# EAGLE board clean_with_no_autoroute (EAGLE 7.2.0)
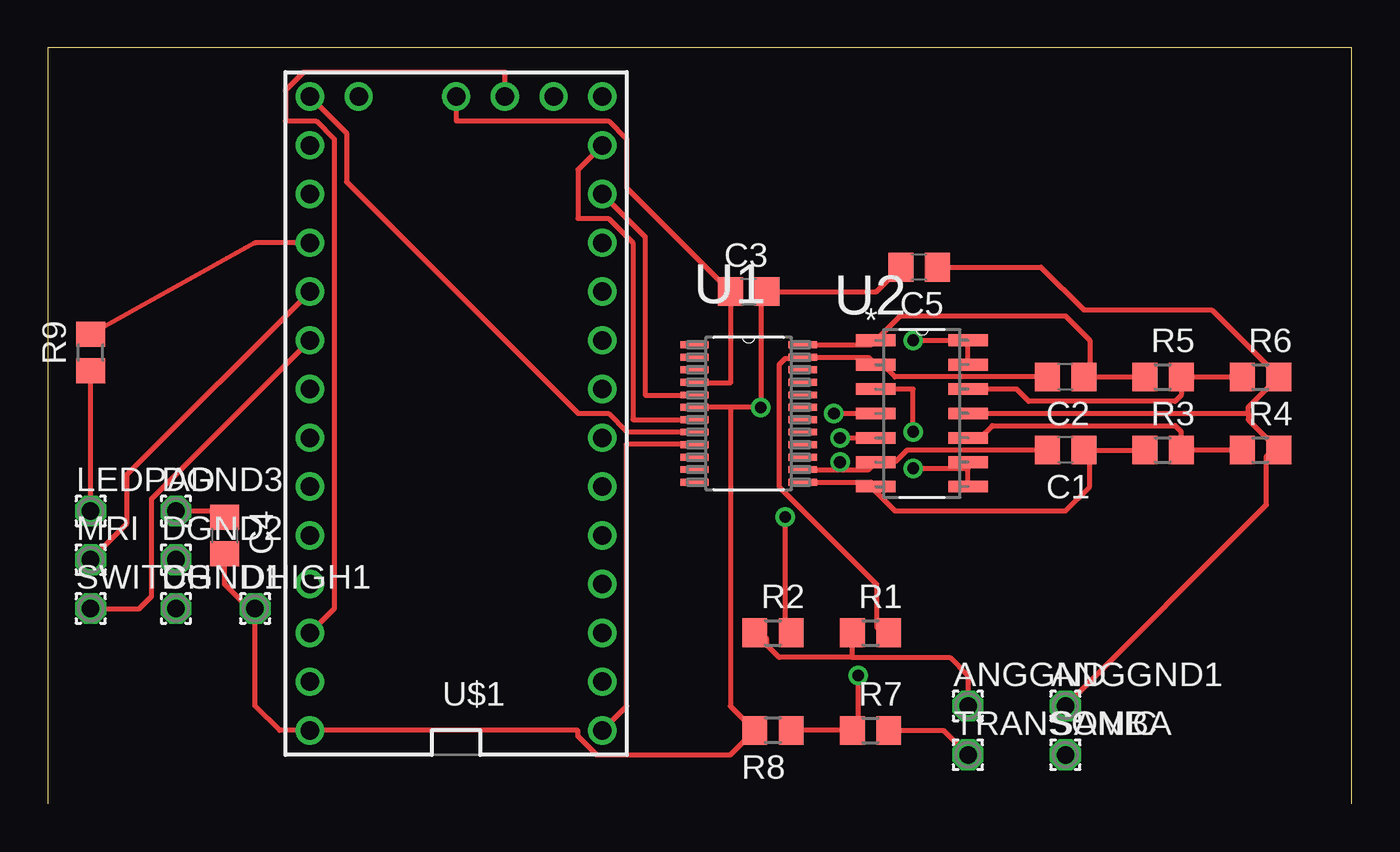
[diagram p0: board, top side]
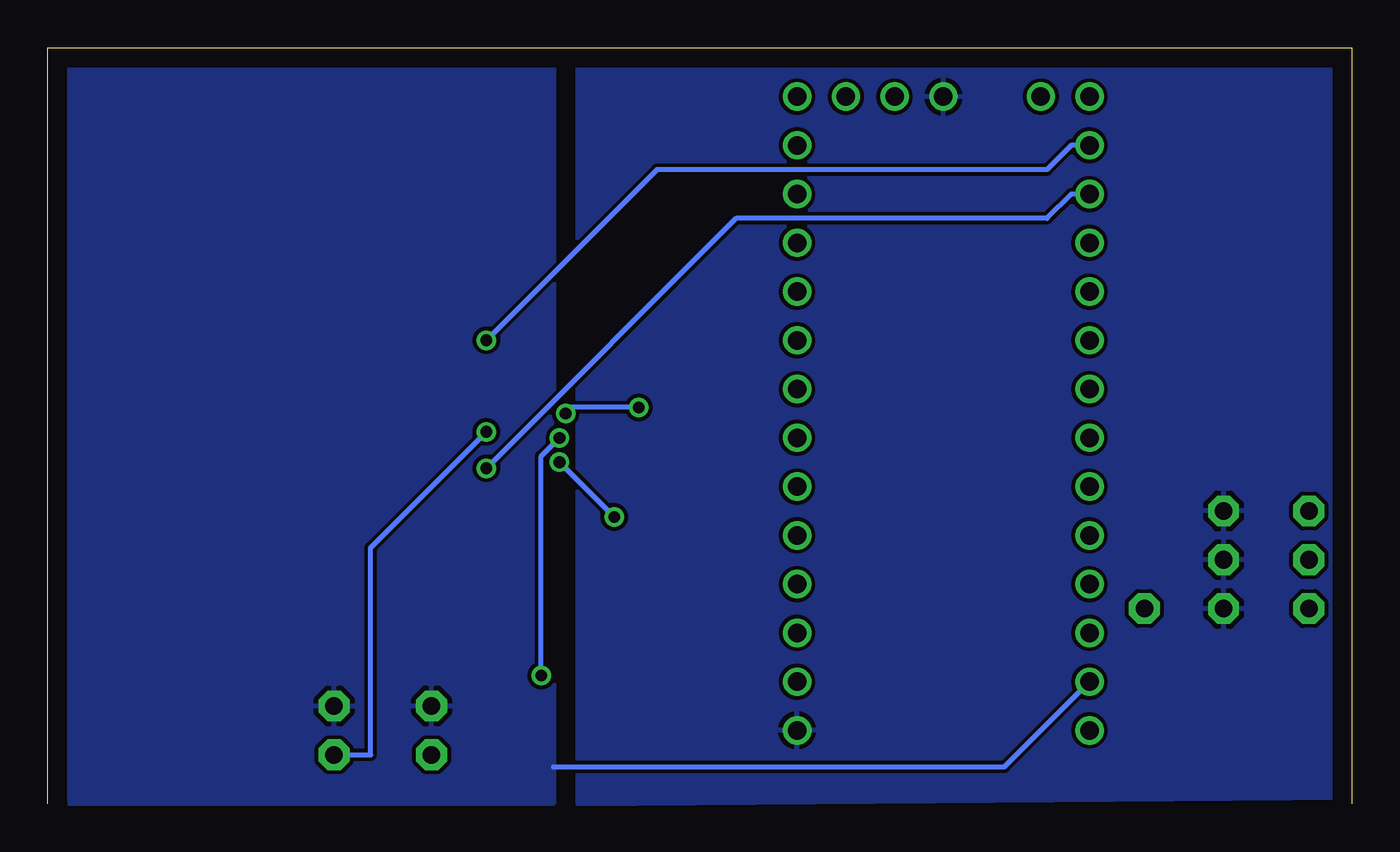
[diagram p1: board, bottom side, seen from below]

Size 67.93 x 39.36 mm. Coordinates in mm from the lower left corner, seen from the top.
Outline: 67.93,0 67.93,39.36 0,39.36 0,0
Copper layers (1*16): Top 0.035mm / dielectric 1.5mm / Bottom 0.035mm
Design rules "default": minimum track width 10mil, minimum drill 24mil, track to track 8mil, track to pad 8mil, pad to pad 8mil, via to via 8mil, smd to smd 8mil, copper to edge 40mil, drill to drill 8mil, minimum pad ring 10mil, minimum via ring 8mil, stop-mask expansion 4mil, vias tented up to drill 0mil, thermal gap 10mil

## Footprints (pad centres in the part's own frame; a part is rotated, then mirrored left to right if it is on the bottom)
1,6/0,9 = drill 0.914 pad 1.6 octagon: 1 0,0
C0805 = smd 1.3 x 1.5: 1 -0.95,0; 2 0.95,0
R0805 = smd 1.3 x 1.5: 1 -0.95,0; 2 0.95,0
SOP65P640X120-24N = smd 1.473 x 0.356: 1 -2.819,3.581; 2 -2.819,2.921; 3 -2.819,2.286; 4 -2.819,1.626; 5 -2.819,0.965; 6 -2.819,0.33; 7 -2.819,-0.33; 8 -2.819,-0.965; 9 -2.819,-1.626; 10 -2.819,-2.286; 11 -2.819,-2.921; 12 -2.819,-3.581; 13 2.819,-3.581; 14 2.819,-2.921; 15 2.819,-2.286; 16 2.819,-1.626; 17 2.819,-0.965; 18 2.819,-0.33; 19 2.819,0.33; 20 2.819,0.965; 21 2.819,1.626; 22 2.819,2.286; 23 2.819,2.921; 24 2.819,3.581
SOIC127P600X175-14N = smd 2.057 x 0.61: 1 -4.801,7.62; 2 -4.801,6.35; 3 -4.801,5.08; 4 -4.801,3.81; 5 -4.801,2.54; 6 -4.801,1.27; 7 -4.801,0; 8 0,0; 9 0,1.27; 10 0,2.54; 11 0,3.81; 12 0,5.08; 13 0,6.35; 14 0,7.62
TEENSY_3.0_BASIC-PGM = drill 0.965: 0 -7.62,13.97; 1 -7.62,11.43; 2 -7.62,8.89; 3 -7.62,6.35; 3.3V 7.62,11.43; 3.3V1 -2.54,-16.51; 4 -7.62,3.81; 5 -7.62,1.27; 6 -7.62,-1.27; 7 -7.62,-3.81; 8 -7.62,-6.35; 9 -7.62,-8.89; 10 -7.62,-11.43; 11 -7.62,-13.97; 12 -7.62,-16.51; 13 7.62,-16.51; 14/A0 7.62,-13.97; 15/A1 7.62,-11.43; 16/A2 7.62,-8.89; 17/A3 7.62,-6.35; 18/A4 7.62,-3.81; 19/A5 7.62,-1.27; 20/A6 7.62,1.27; 21/A7 7.62,3.81; 22/A8 7.62,6.35; 23/A9 7.62,8.89; AGND 7.62,13.97; GND -7.62,16.51; GND1 0,-16.51; RESET 5.08,-16.51; VBAT -5.08,-16.51; VIN 7.62,16.51

## Placement (x,y rotation side)
ANGGND  WIREPAD1,6/0,9  [1,6/0,9]  47.94,5.08 0 top
ANGGND1  WIREPAD1,6/0,9  [1,6/0,9]  53.02,5.08 0 top
C1  10pF  [C0805]  53.02,18.41 180 top
C2  10pF  [C0805]  53.02,22.23 180 top
C3  0.1uF  [C0805]  36.51,26.67 0 top
C4  0.1uF  [C0805]  9.21,13.97 270 top
C5  0.1uF  [C0805]  45.4,27.94 180 top
DGND1  WIREPAD1,6/0,9  [1,6/0,9]  6.67,10.16 0 top
DGND2  WIREPAD1,6/0,9  [1,6/0,9]  6.67,12.7 0 top
DGND3  WIREPAD1,6/0,9  [1,6/0,9]  6.67,15.24 0 top
DHIGH1  WIREPAD1,6/0,9  [1,6/0,9]  10.79,10.16 0 top
LEDPAD  WIREPAD1,6/0,9  [1,6/0,9]  2.22,15.24 0 top
MRI  WIREPAD1,6/0,9  [1,6/0,9]  2.22,12.7 0 top
R1  5k  [R0805]  42.86,8.89 0 top
R2  5k  [R0805]  37.78,8.89 0 top
R3  12k  [R0805]  58.1,18.41 0 top
R4  23.2k  [R0805]  63.18,18.41 0 top
R5  12k  [R0805]  58.1,22.23 0 top
R6  23.2k  [R0805]  63.18,22.23 0 top
R7  10k  [R0805]  42.86,3.81 0 top
R8  10k  [R0805]  37.78,3.81 180 top
R9  681  [R0805]  2.22,23.5 90 top
SAMBA  SAMBA  [1,6/0,9]  53.02,2.54 0 top
SWITCH  WIREPAD1,6/0,9  [1,6/0,9]  2.22,10.16 0 top
TRANSONIC  WIREPAD1,6/0,9  [1,6/0,9]  47.94,2.54 0 top
U1  AD5206BRUZ10  [SOP65P640X120-24N]  36.51,20.32 0 top
U2  OPA4340UA  [SOIC127P600X175-14N]  47.94,16.51 0 top
U$1  TEENSY_3.0_BASIC-PGM  [TEENSY_3.0_BASIC-PGM]  21.27,20.32 180 top

## Library data of the parts
ANGGND ANGGND1 DGND1-DGND3 DHIGH1 LEDPAD MRI SAMBA SWITCH TRANSONIC = wirepad
C1-C5 R1-R9 = resistor
U1 = AD5206; MPN: AD5206BRUZ10; OC_FARNELL: unknown; OC_NEWARK: 87H9785; PACKAGE: TSSOP-24; SUPPLIER: Analog Devices
U2 = Texas Instruments_By_element14_Batch_1; MPN: OPA4340UA; OC_FARNELL: 1212307; OC_NEWARK: 35C1907; PACKAGE: SOIC-14; SUPPLIER: Texas Instruments
U$1 = Teensy3.0

## Nets
3.3V: U$1.3.3V U$1.3.3V1
AGND: ANGGND1.1 ANGGND.1 C5.1 R1.1 R2.1 R4.2 R6.2 U2.11 U$1.AGND
GND: C3.1 C4.1 DGND1.1 DGND2.1 DGND3.1 U1.4 U1.9 U$1.GND U$1.GND1
N$1: U2.13 U2.14 U$1.14/A0
N$2: U2.8 U2.9 U$1.15/A1
N$3: C2.2 R1.2 U1.23 U2.2
N$4: R7.1 R8.1 U2.5
N$5: C2.1 R5.1 U1.24 U2.1
N$6: R5.2 R6.1 U2.12
N$7: U1.5 U$1.10
N$8: U1.7 U$1.11
N$9: R3.2 R4.1 U2.10
N$10: SAMBA.1 U2.3
N$11: LEDPAD.1 R9.1
N$12: C1.2 R2.2 U1.14 U2.6
N$13: R7.2 TRANSONIC.1
N$14: R9.2 U$1.16/A2
N$15: MRI.1 U$1.17/A3
N$16: SWITCH.1 U$1.18/A4
N$17: C1.1 R3.1 U1.13 U2.7
N$19: U1.8 U$1.13
VBAT: U$1.VBAT
VCC: C3.2 C4.2 C5.2 DHIGH1.1 R8.2 U1.6 U2.4 U$1.VIN

## Tracks (layer width: path | path; a pad name or v marks a point on that pad's centre or on a via)
3.3V
  Top 0.254: U$1.3.3V 14.92,10.16 14.92,34.61 13.97,35.56 12.38,35.56 12.38,37.15 13.34,38.1 23.81,38.1 U$1.3.3V1
AGND
  Top 0.254: 63.82,22.23 R6.2 | 41.91,7.62 38.1,7.62 37.47,8.26 37.47,8.57 37.15,8.89 R2.1 | 41.91,7.62 R1.1 | ANGGND1.1 63.5,15.56 63.5,18.1 63.82,18.41 R4.2 62.55,20 62.55,20.32 | C5.1 51.75,27.94 53.98,25.72 60.64,25.72 R6.2 | 41.91,7.62 46.99,7.62 47.94,6.67 ANGGND.1 | U2.11 62.55,20.32 | 62.55,20.32 62.55,20.64 R6.2
  Bottom 0.254: U$1.AGND 18.1,1.91 41.59,1.91
  pour Bottom: 41.59,39.37 41.59,0 67.63,0 67.63,39.37
GND
  Top 0.254: C3.1 35.56,21.91 33.97,21.91 U1.4 | U$1.GND 30.16,5.08 30.16,18.73 33.66,18.73 U1.9 | C3.1 30.16,32.07 30.16,34.61 29.21,35.56 21.27,35.56 U$1.GND1 | C3.1 | DGND3.1 8.89,15.24 C4.1
  pour Bottom: 0,39.69 40.32,39.37 40.32,0 0,0.32
N$1  (via drill 0.61)
  Top 0.254: U2.13 U2.14 v45.09,24.13
  Bottom 0.254: v45.09,24.13 36.19,33.02 15.87,33.02 14.6,34.29 U$1.14/A0
N$2  (via drill 0.61)
  Top 0.254: U2.8 47.94,17.46 | 47.94,17.46 U2.9 | v45.09,17.46 47.94,17.46
  Bottom 0.254: v45.09,17.46 32.07,30.48 15.87,30.48 14.6,31.75 U$1.15/A1
N$3
  Top 0.254: C2.2 44.13,22.23 43.5,22.86 U2.2 42.76,23.24 U1.23 39.05,23.18 38.42,23.18 38.1,22.86 38.1,16.51 43.18,11.43 43.18,9.21 43.5,8.89 R1.2
N$4  (via drill 0.61)
  Top 0.254: R8.1 R7.1 42.23,3.81 v42.23,6.67 | v41.27,19.05 U2.5
  Bottom 0.254: v41.27,19.05 42.23,18.1 v42.23,6.67
N$5
  Top 0.254: R5.1 C2.1 54.29,22.55 54.29,24.13 53.02,25.4 44.41,25.4 U2.1 42.91,23.9 U1.24
N$6
  Top 0.254: R6.1 R5.2 59.05,21.27 58.74,20.95 51.12,20.95 50.48,21.59 U2.12
N$7
  Top 0.254: U$1.10 31.12,29.53 31.12,21.27 33.66,21.27 U1.5
N$8
  Top 0.254: U$1.11 27.62,33.02 27.62,30.48 29.21,30.48 30.48,29.21 30.48,20 33.66,20 U1.7
N$9
  Top 0.254: R4.1 R3.2 59.05,19.37 58.74,19.68 49.21,19.68 48.58,19.05 U2.10
N$10  (via drill 0.61)
  Top 0.254: U2.3 45.09,21.59 v45.09,19.37
  Bottom 0.254: v45.09,19.37 51.12,13.34 51.12,2.54 SAMBA.1
N$11
  Top 0.254: LEDPAD.1 R9.1
N$12  (via drill 0.61)
  Top 0.254: C1.2 44.77,18.41 44.13,17.78 U2.6 42.76,17.4 41.27,17.4 | U1.14 41.27,17.4 | v38.42,14.92 38.42,8.89 R2.2 | 41.27,17.4 v41.27,17.78
  Bottom 0.254: v41.27,17.78 v38.42,14.92
N$13
  Top 0.254: R7.2 46.67,3.81 TRANSONIC.1
N$14
  Top 0.254: U$1.16/A2 10.8,29.21 R9.2
N$15
  Top 0.254: MRI.1 4.13,14.61 4.13,17.14 U$1.17/A3
N$16
  Top 0.254: SWITCH.1 4.76,10.16 5.4,10.79 5.4,15.88 U$1.18/A4
N$17
  Top 0.254: R3.1 C1.1 54.29,18.09 54.29,16.51 53.02,15.24 44.13,15.24 43.14,16.23 U2.7 42.91,16.74 U1.13
N$19
  Top 0.254: U$1.13 15.56,34.92 15.56,32.38 27.62,20.32 29.21,20.32 30.16,19.37 33.66,19.37 U1.8
VCC  (via drill 0.61)
  Top 0.254: 35.56,20.64 v37.15,20.64 37.15,26.67 C3.2 | 35.56,20.64 33.97,20.64 U1.6 | 35.56,20.64 35.56,5.08 R8.2 35.56,2.54 28.57,2.54 27.62,3.49 27.62,3.81 U$1.VIN 12.07,3.81 10.79,5.08 DHIGH1.1 10.48,10.16 9.21,11.43 C4.2 | C3.2 | v40.96,20.32 U2.4 | C3.2 43.18,26.67 C5.2
  Bottom 0.254: v40.96,20.32 40.64,20.64 v37.15,20.64